# Altium PCB STM32F103CBU6.PcbDoc
Units mm, origin at the board's own origin, x right, y up, seen from the top; angles counter-clockwise.
Board outline 30.73 x 14.49 mm, 2 copper layers (Top Layer, Bottom Layer); 19 components, 17 nets, 97 pads, 25 vias.
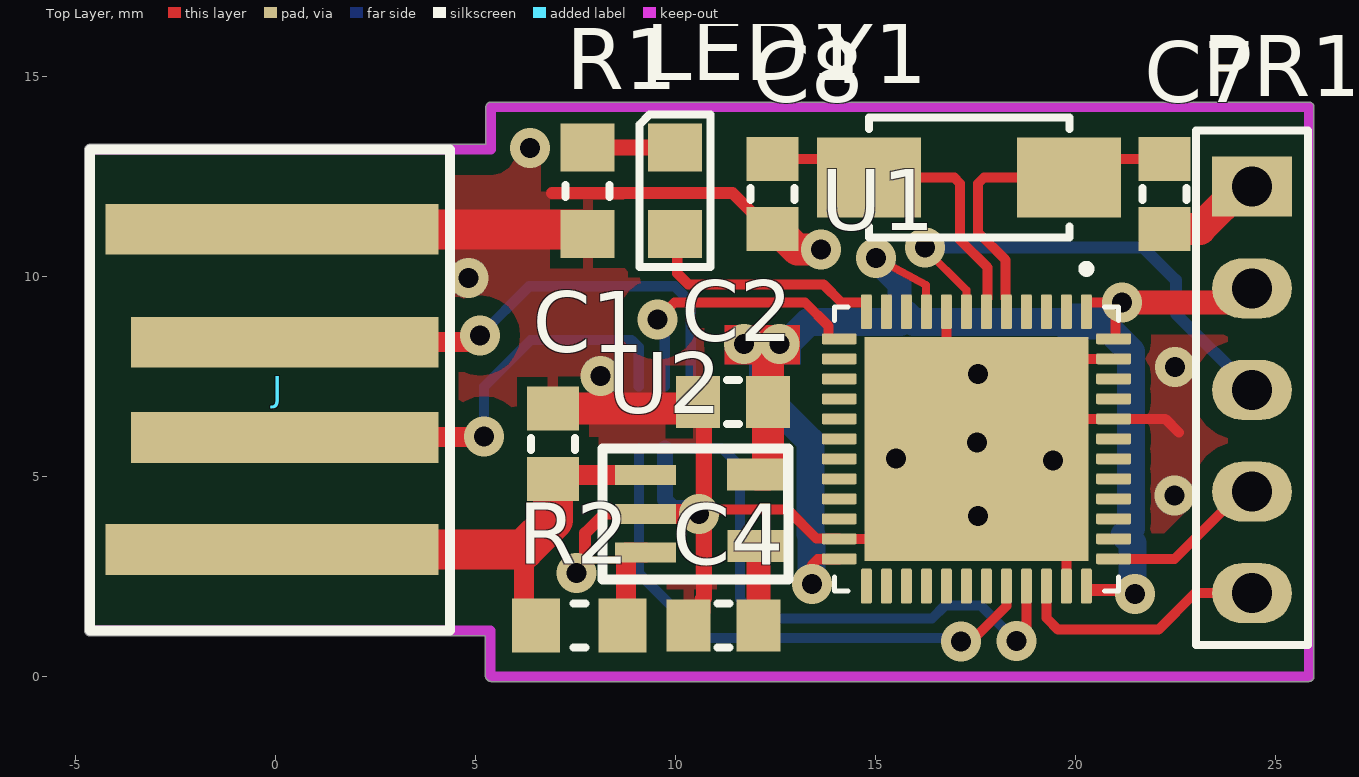
[diagram p0: Top Layer view]
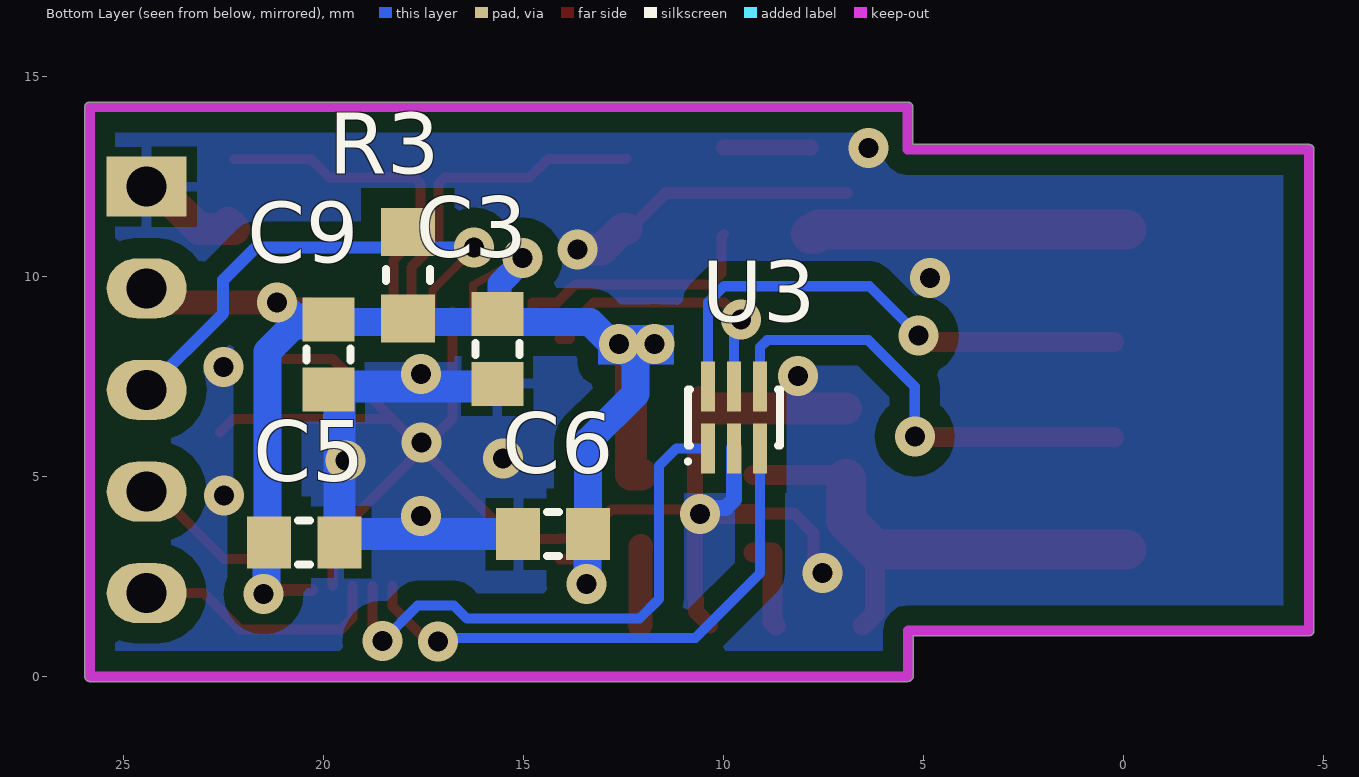
[diagram p1: Bottom Layer view, seen from below]
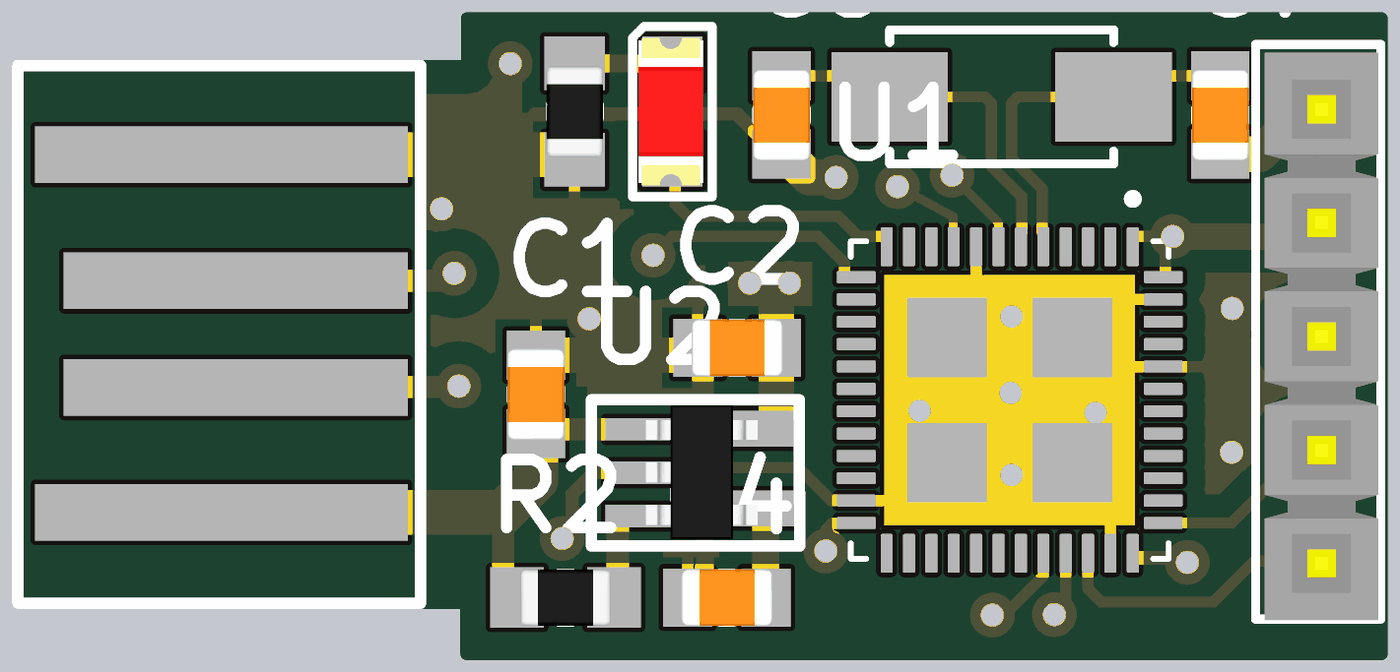
[diagram p2: 3D render of the assembled board from above, using the file's embedded part models]
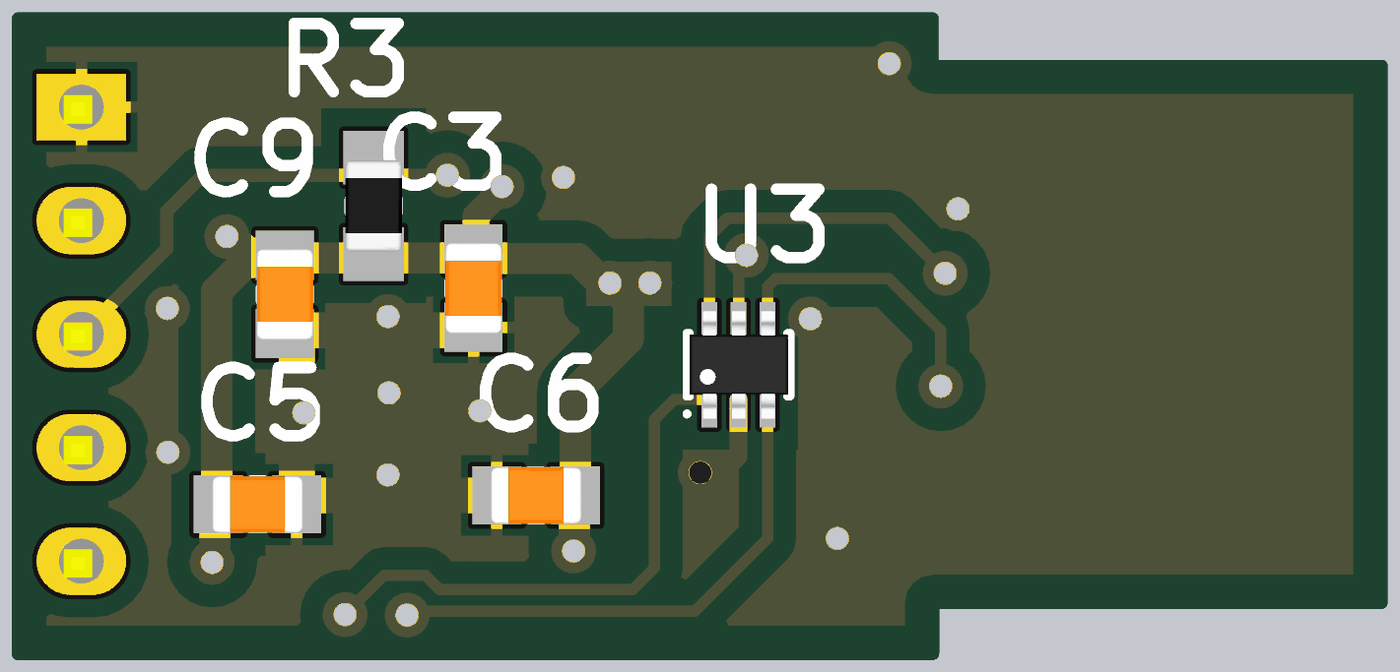
[diagram p3: 3D render of the assembled board from below, using the file's embedded part models]

## Layer stack, top to bottom
Top Solder: solder mask 0.0102, Solder Resist, Dk 3.5
Top Layer: signal copper 0.0356
Dielectric 1: dielectric 0.32, FR-4, Dk 4.8
Bottom Layer: signal copper 0.0356
Bottom Solder: solder mask 0.0102, Solder Resist, Dk 3.5

## Board outline
-4.643,1.018 ccw(c-4.643,1.145) -4.643,1.018 5.245,1.018 5.245,0.012 ccw(c5.372,0.012) 5.289,-0.084 ccw(c5.385,0) 5.385,-0.127 25.832,-0.127 ccw(c25.832,0) 25.959,0 25.959,14.232 ccw(c25.832,14.232) 25.832,14.359 5.385,14.359 ccw(c5.385,14.232) 5.257,14.232 5.257,13.301 -4.643,13.301 ccw(c-4.643,13.173) -4.644,13.301 ccw(c-4.644,13.173) -4.772,13.173 -4.772,1.145 ccw(c-4.644,1.145)

## Design rules (kind name [scope] priority, off if disabled: settings)
Clearance [All] p1: gap=0.2 ignorepadtopadclearanceinfootprint=FALSE except(0.5: Arc-Poly Track-Poly SMDPad-Poly THPad-Poly Via-Poly Fill-Poly Poly-Poly)
DiffPairsRouting [All] p1: maxlimit=0.3 minlimit=0.2 mostfreqgap=0.2 toplayer_minwidth=0.2 toplayer_maxwidth=0.381 toplayer_prefwidth=0.25 bottomlayer_minwidth=0.2 bottomlayer_maxwidth=0.381 bottomlayer_prefwidth=0.25 maxuncoupledlength=12.7
PolygonConnect [All] p1: connectstyle=Relief reliefconductorwidth=0.254 reliefentries=4 polygonreliefangle="90 Angle" airgapwidth=0.254
RoutingVias [All] p1: holewidth=0.5 width=1 viastyle="Through Hole" minholewidth=0.5 minwidth=1 maxholewidth=0.711 maxwidth=1.27
SolderMaskExpansion [All] p1: expansion=0.102 istentingtop=FALSE
Width [All] p1: maxlimit=10 minlimit=0.2 preferedwidth=0.2
29 further rules are at their usual default settings.

## Classes and differential pairs
differential pair OSC: +OSC_P -OSC_N

## Components (designator, comment, footprint, x,y, rotation, side; value= is the part's Value field where it differs from the comment)
C1 "10uF" "SMD 0805" 6.934,5.817 r270 top
C2 "10uF" "SMD 0805" 11.43,6.858 r0 top
C3 "100nF" "SMD 0805" 15.646,8.191 r90 bottom
C4 "10nF" "SMD 0805" 11.201,1.27 r0 top
C5 "100nF" "SMD 0805" 20.472,3.353 r0 bottom
C6 "100nF" "SMD 0805" 14.249,3.556 r180 bottom
C7 "22pF" "SMD 0805" 22.225,12.065 r270 top
C8 "22pF" "SMD 0805" 12.421,12.065 r270 top
C9 "100nF" "SMD 0805" 19.863,8.052 r90 bottom
J "USB-Type A-Plug in" USB-TypeA-PlugIn 4.356,1.145 r90 top
LED1 "LED 2PIN" "LED 0805" 9.982,12.141 r90 top
PR1 "Program interface SWD" "HEADER 5X1" 24.409,7.163 r270 top
R1 "4K7" 0805_1/8W 7.8,12.141 r90 top
R2 "100K" 0805_1/8W 7.595,1.27 r180 top
R3 "4K7" 0805_1/8W 17.882,10.033 r270 bottom
U1 "STM32F103CBU6" QFN50P700X700X60-49N 17.519,5.689 r270 top
U2 "SGM2019" TSOT23 9.246,3.094 r90 top
U3 "USBUF02W6" "SOT323 6-Lead" 9.728,6.477 r180 bottom
Y1 "XTAL" "XTAL YIC 8.0000" 14.837,12.471 r0 top

## Footprints (in the part's own frame and the unit in brackets; to place one, negate y for a bottom-side part, rotate by r counter-clockwise, add the part's x,y. Pads: shape width x height; smd on the part's side, far side on the other; paste and mask are expansions set on the pad)
0805_1/8W [mm] "Chip Resistor, 2-Leads, Body 2.0x1.3mm, IPC High Density _ (0.100 W)"
  rect 1.2x1.35 smd: 1(-1.079,0) 2(1.079,0)
  silkscreen extent -0.15,-0.55 0.15,0.55, body extent -1.02,-0.63 1.02,0.64, height 0.6
"HEADER 5X1" [mm]
  rect 1.5x2 hole 1: 1(-5.08,0)
  oval 1.5x2 hole 1: 2(-2.54,0) 3(0,0) 4(2.54,0) 5(5.08,0)
  silkscreen extent -6.48,-1.4 6.38,1.4, body extent -6.3,-1.19 6.4,1.35, height 8.38
"LED 0805" [mm]
  rect 1.2x1.35 smd: 1(-1.079,0) 2(1.079,0)
  silkscreen extent -1.91,-0.89 1.91,0.89, body extent -1.65,-0.69 1.65,0.76, height 1.36
QFN50P700X700X60-49N [mm]
  rrect25% 0.87x0.27 smd: 1(-3.43,2.75) 2(-3.43,2.25) 3(-3.43,1.75) 4(-3.43,1.25) 5(-3.43,0.75) 6(-3.43,0.25) 7(-3.43,-0.25) 8(-3.43,-0.75) 9(-3.43,-1.25) 10(-3.43,-1.75) 11(-3.43,-2.25) 12(-3.43,-2.75) 25(3.43,-2.75) 26(3.43,-2.25) 27(3.43,-1.75) 28(3.43,-1.25) 29(3.43,-0.75) 30(3.43,-0.25) 31(3.43,0.25) 32(3.43,0.75) 33(3.43,1.25) 34(3.43,1.75) 35(3.43,2.25) 36(3.43,2.75)
  rrect25% 0.27x0.87 smd: 13(-2.75,-3.43) 14(-2.25,-3.43) 15(-1.75,-3.43) 16(-1.25,-3.43) 17(-0.75,-3.43) 18(-0.25,-3.43) 19(0.25,-3.43) 20(0.75,-3.43) 21(1.25,-3.43) 22(1.75,-3.43) 23(2.25,-3.43) 24(2.75,-3.43) 37(2.75,3.43) 38(2.25,3.43) 39(1.75,3.43) 40(1.25,3.43) 41(0.75,3.43) 42(0.25,3.43) 43(-0.25,3.43) 44(-0.75,3.43) 45(-1.25,3.43) 46(-1.75,3.43) 47(-2.25,3.43) 48(-2.75,3.43)
  rect 5.6x5.6 smd paste-4: 49(0,0)
  silkscreen extent -4.6,-3.55 3.55,3.55
"SMD 0805" [mm]
  rect 1.1x1.3 smd: 1(-0.876,0) 2(0.876,0)
  silkscreen extent -0.15,-0.55 0.15,0.55, body extent -1.02,-0.63 1.02,0.63, height 0.65
"SOT323 6-Lead" [mm]
  rect 0.35x1.25 smd: 1(-0.65,-0.775) 2(0,-0.775) 3(0.65,-0.775) 4(0.65,0.775) 5(0,0.775) 6(-0.65,0.775)
  silkscreen extent -1.2,-1.15 1.15,0.7, body extent -1.09,-1.2 1.11,1.2, height 1.1
TSOT23 [mm]
  rect 0.5x1.524 smd: 1(1.94,0) 2(0.97,0) 3(0,0)
  rect 0.8x1.524 smd: 4(0.17,-2.81) 5(1.95,-2.8)
  silkscreen extent -0.67,-3.58 2.6,1.07, body extent -0.53,-2.64 2.47,-0.14, height 1.1
USB-TypeA-PlugIn [mil]
  rect 50x327.87 smd: 01(80,175) 04(395,175)
  rect 50x302.87 smd: 02(190,162.5) 03(283.94,162.5)
  silkscreen extent 0,0 474,354
"XTAL YIC 8.0000" [mm]
  rect 2.6x2 smd: 1(0,0) 2(5,0)
  silkscreen extent 0,-1.5 5,1.5

## Part data
C1 C2 C3 C4 C5 C6 C7 C8 C9: library part "CAP NON"
J: library part USB-AM-S-X-X-TH, "USB-A (USB TYPE-A) USB 2.0 Plug Connector 4 Position Through Hole, Right Angle", Package=None, Availability=Unavailable, MF=Samtec, MP=USB-AM-S-F-B-TH, Price=None, SnapEDA_Link=https://www.snapeda.com/parts/USB-AM-S-F-B-TH/Samtec%20Inc./view-part/474273/?ref=snap, Toby_UK-Purchase-URL=https://snapeda.com/shop?store=Toby+UK&id=474273
R1 R2 R3: library part RESISTOR
U1: library part STM32F103CBT6, "STM32 ARM-based 32-bit MCU with 128 Kbytes Flash, 48-pin LQFP, Industrial Temperature"
U2: library part L2980

## Via types
v1: diameter 1, hole 0.5, Top Layer to Bottom Layer, tented both sides, 25 vias

## Nets (pads, with @x,y where several pads share a name; then routed paths per layer and width w, separated by ;. In a path a pad name is that pad's centre, name@x,y a point inside that pad or via, vN(x,y) a via of type N, cw(c..) or ccw(c..) an arc to the next point about the centre after c; other vN are vias at no path point)
3V3: C2.2 C3.2 C5.2 C6.2 C9.2 PR1.2 R3.2 U1.1 U1.9 U1.24 U1.36 U1.48 U2.5 | length 39.5
  Top Layer w0.2: v1@15.373,10.445 15.373,10.508 15.29,10.592 15.163,10.465 v1(15.011,10.465) 16.258,9.79 16.258,9.13 U1.9
  Top Layer w0.254: v1(13.411,2.311) 13.411,2.79 13.552,2.931 14.081,2.931 U1.24 ; U1.1 20.269,9.339 20.277,9.347 v1(21.158,9.347) 20.996,9.185 20.996,8.447 20.988,8.439 U1.48
  Top Layer w0.3: U1.36@20.284,2.158 21.388,2.158 v1(21.488,2.057)
  Top Layer w0.6: v1(21.158,9.347) 24.054,9.347 PR1.2
  Top Layer w0.8: U2.5 12.306,5.044 C2.2 v1@12.306,8.331
  Bottom Layer w0.6: v1(15.011,10.465) 15.011,10.389 15.596,9.804 15.596,9.218 C3.2@15.746,9.067
  Bottom Layer w0.7: v1(13.411,2.311) 13.392,2.33 13.392,3.537 C6.2 13.374,5.88 12.19,7.063 12.19,7.897 v1(12.598,8.306) 12.776,8.306 13.326,8.856 14.936,8.856 14.947,8.867 C3.2@15.621,8.867 ; C3.2@15.746,9.067 15.949,8.865 17.882,8.865 C9.2@19.572,8.865 ; v1(21.158,9.347) 21.077,9.347 20.705,8.975 19.961,8.975 19.761,8.775 20.74,8.775 21.387,8.128 21.387,3.696 21.221,3.531 21.421,3.331 21.421,2.206 21.488,2.139 v1(21.488,2.057)
  other v1: 11.709,8.306
5V0: C1.2 J.01 R2.2 U2.1 | length 12.7
  Top Layer w0.5: 6.206,3.177 6.206,1.58 R2.2 ; C1.2@6.943,5.034 U2.1
  Top Layer w1: J.01 6.206,3.177 6.934,3.905 C1.2
GND: C1.1 C2.1 C3.1 C4.1 C5.1 C6.1 C7.2 C8.2 C9.1 J.04 PR1.1 R1.1 U1.8 U1.23 U1.35 U1.44 U1.47 U1.49 U2.2 U3.2 | length 71.8
  Top Layer w0.2: U1.23@14.082,3.446 U1.23
  Top Layer w0.254: v1@10.631,4.177 10.707,4.177 12.79,4.177 13.522,3.446 U1.23@14.082,3.446 ; C8.2@12.321,11.189 C8.2 ; U1.23 15.269,3.439 U1.49 ; U1.8 16.769,6.439 U1.49 ; U1.35 19.769,3.439 U1.49 ; U1.47 19.769,7.939 U1.49@18.269,6.439 ; 22.581,6.096 22.238,6.439 U1.44 U1.49@18.269,6.439 ; U1.49 U1.49@18.269,6.439
  Top Layer w0.3: 6.909,12.09 11.419,12.09 C8.2@12.321,11.189 ; v1(7.519,2.59) 7.74,2.811 7.74,3.583 8.226,4.07 9.24,4.07 U2.2
  Top Layer w0.4: C4.1 10.676,1.62 10.676,1.922 10.707,1.954 10.707,3.938 10.707,4.101 10.707,4.177 10.707,6.705 C2.1 ; v1@10.707,3.939 v1@10.707,4.1
  Top Layer w0.5: U2.2 v1(10.582,4.064)
  Top Layer w0.8: C1.1 10.404,6.692 10.554,6.842 C2.1 ; C8.2 12.521,11.189 13.042,10.668 v1(13.64,10.668) ; C7.2@22.375,11.339 C7.2 23.106,11.189 24.159,12.243 PR1.1
  Top Layer w1: J.04 7.61,11.178 7.725,11.062 R1.1
  Bottom Layer w0.4: U3.2 9.728,4.42 9.931,4.216 v1@10.592,4.216
  Bottom Layer w0.8: C6.1 19.447,3.556 C5.1@19.597,3.406 ; C3.1 15.716,7.246 19.793,7.246 19.793,7.206 19.597,7.01 C5.1@19.597,3.406 ; C5.1 C5.1@19.597,3.406
  other v1: 17.559,4.013 22.475,4.521 19.437,5.403 15.506,5.448 17.538,5.848 8.124,7.507 17.559,7.558 22.489,7.739 4.824,9.966 6.361,13.216
LED: LED1.1 U1.12 | length 6.3
  Top Layer w0.254: LED1.1 10.039,11.005 10.039,10.078 10.316,9.801 13.694,9.801 14.148,9.347 14.761,9.347 14.769,9.339 U1.12
NetC4_2: C4.2 U2.4 | length 2
  Top Layer w0.6: U2.4 12.066,3.253 12.066,1.281 C4.2
NetJ_02: J.02 U3.4 | length 11.6
  Top Layer w0.5: J.02 0.243,5.985 5.195,5.985 v1(5.209,5.999)
  Bottom Layer w0.254: v1(5.209,5.999) 5.209,7.243 6.374,8.407 8.901,8.407 9.078,8.23 U3.4
NetJ_03: J.03 U3.6 | length 13
  Top Layer w0.5: J.03 4.943,8.357 v1(5.11,8.524)
  Bottom Layer w0.254: v1(5.11,8.524) 6.34,9.754 9.982,9.754 10.378,9.358 U3.6
NetLED1_2: LED1.2 R1.2 | length 2.2
  Top Layer w0.4: R1.2 LED1.2
NetR2_1: R2.1 U2.3 | length 2.3
  Top Layer w0.5: R2.1 8.763,1.359 8.763,3.094 U2.3
OSC_N: C8.1 U1.6 Y1.1 | length 8.4
  Top Layer w0.25: C8.1 14.368,12.941 Y1.1 16.966,12.471 17.112,12.325 17.112,10.911 17.794,10.229 17.794,9.444 17.769,9.419 U1.6
OSC_P: C7.1 U1.5 Y1.2 | length 8.4
  Top Layer w0.25: U1.5 18.269,9.419 18.244,9.444 18.244,10.415 17.562,11.097 17.562,12.325 17.709,12.471 Y1.2 20.307,12.941 C7.1
RESET: PR1.3 R3.1 U1.7 | length 12.2
  Top Layer w0.2: v1@16.218,10.706 17.269,9.655 U1.7
  Bottom Layer w0.3: v1(16.231,10.719) 17.882,10.719 21.692,10.719 22.504,9.906 22.504,9.068 PR1.3
SWCLK: PR1.4 U1.37 | length 4.2
  Top Layer w0.25: U1.37 22.475,2.939 24.159,4.623 PR1.4
SWDIO: PR1.5 U1.34 | length 6.4
  Top Layer w0.25: U1.34 19.269,1.457 19.558,1.168 22.073,1.168 22.987,2.083 PR1.5
USB_N: U1.32 U3.3 | length 13.9
  Top Layer w0.25: v1(17.131,0.877) 17.143,0.889 17.399,0.889 18.269,1.759 U1.32
  Bottom Layer w0.25: U3.3 9.078,2.58 10.693,0.965 17.043,0.965 v1(17.131,0.877)
USB_P: U1.33 U3.1 | length 13.8
  Top Layer w0.25: v1(18.517,0.889) 18.769,1.142 U1.33
  Bottom Layer w0.25: U3.1 11.164,5.702 11.608,5.258 11.608,1.93 12.09,1.448 16.408,1.448 16.729,1.768 17.638,1.768 v1(18.517,0.889)
V_USB: U1.13 U3.5 | length 7
  Top Layer w0.254: v1(9.551,8.927) 9.972,9.347 13.233,9.347 13.825,8.756 13.825,8.447 13.833,8.439 U1.13
  Bottom Layer w0.254: v1(9.551,8.927) 9.728,8.75 U3.5
pads on no net: U1.2 U1.3 U1.4 U1.10 U1.11 U1.14 U1.15 U1.16 U1.17 U1.18 U1.19 U1.20 U1.21 U1.22 U1.25 U1.26 U1.27 U1.28 U1.29 U1.30 U1.31 U1.38 U1.39 U1.40 U1.41 U1.42 U1.43 U1.45 U1.46
copper on no net: | length 0
  Top Layer w0.2: 15.734,9.154 15.769,9.119

## Polygon pours and split planes (outlines as drawn)
GND on Bottom Layer "GND_L02_P001" (solid, remove dead copper, pour order 1): 25.832,14.232 25.832,0 -4.602,0 -4.684,-0.082 -4.714,-0.051 -4.714,14.271 -4.737,14.293
GND on Top Layer "GND_L01_P000" (solid, remove dead copper, pour order 0): 25.832,14.232 -4.623,14.232 -4.63,14.239 -4.63,-0.355 25.871,-0.355 25.873,-0.354

## Keep-outs
Keep-Out Layer:
  lines w0.254: -4.644,1.145 -4.644,13.173 ; -4.643,1.145 5.372,1.145 5.372,0.012 ; -4.643,13.173 5.388,13.173 ; 5.385,0 25.832,0 25.832,14.232 5.385,14.232 5.385,13.176

## Other copper
Top Layer:
  region net 3V3: 11.227,8.788 11.227,7.798 13.106,7.798 13.106,8.788
  pour cut-out: -4.643,13.173 -4.636,13.181 4.312,13.181 4.312,1.182 4.342,1.151 4.336,1.145 -4.644,1.145
Bottom Layer:
  region net 3V3: 11.227,8.788 11.227,7.798 13.132,7.798 13.132,8.788